# Altium PCB EnviromentalBoard_panel.PcbDoc
Units mm, origin at the board's own origin, x right, y up, seen from the top; angles counter-clockwise.
Board outline 138.18 x 213.49 mm, 2 copper layers (Top Layer, Bottom Layer); 9 components, 0 nets, 9 pads, 0 vias.
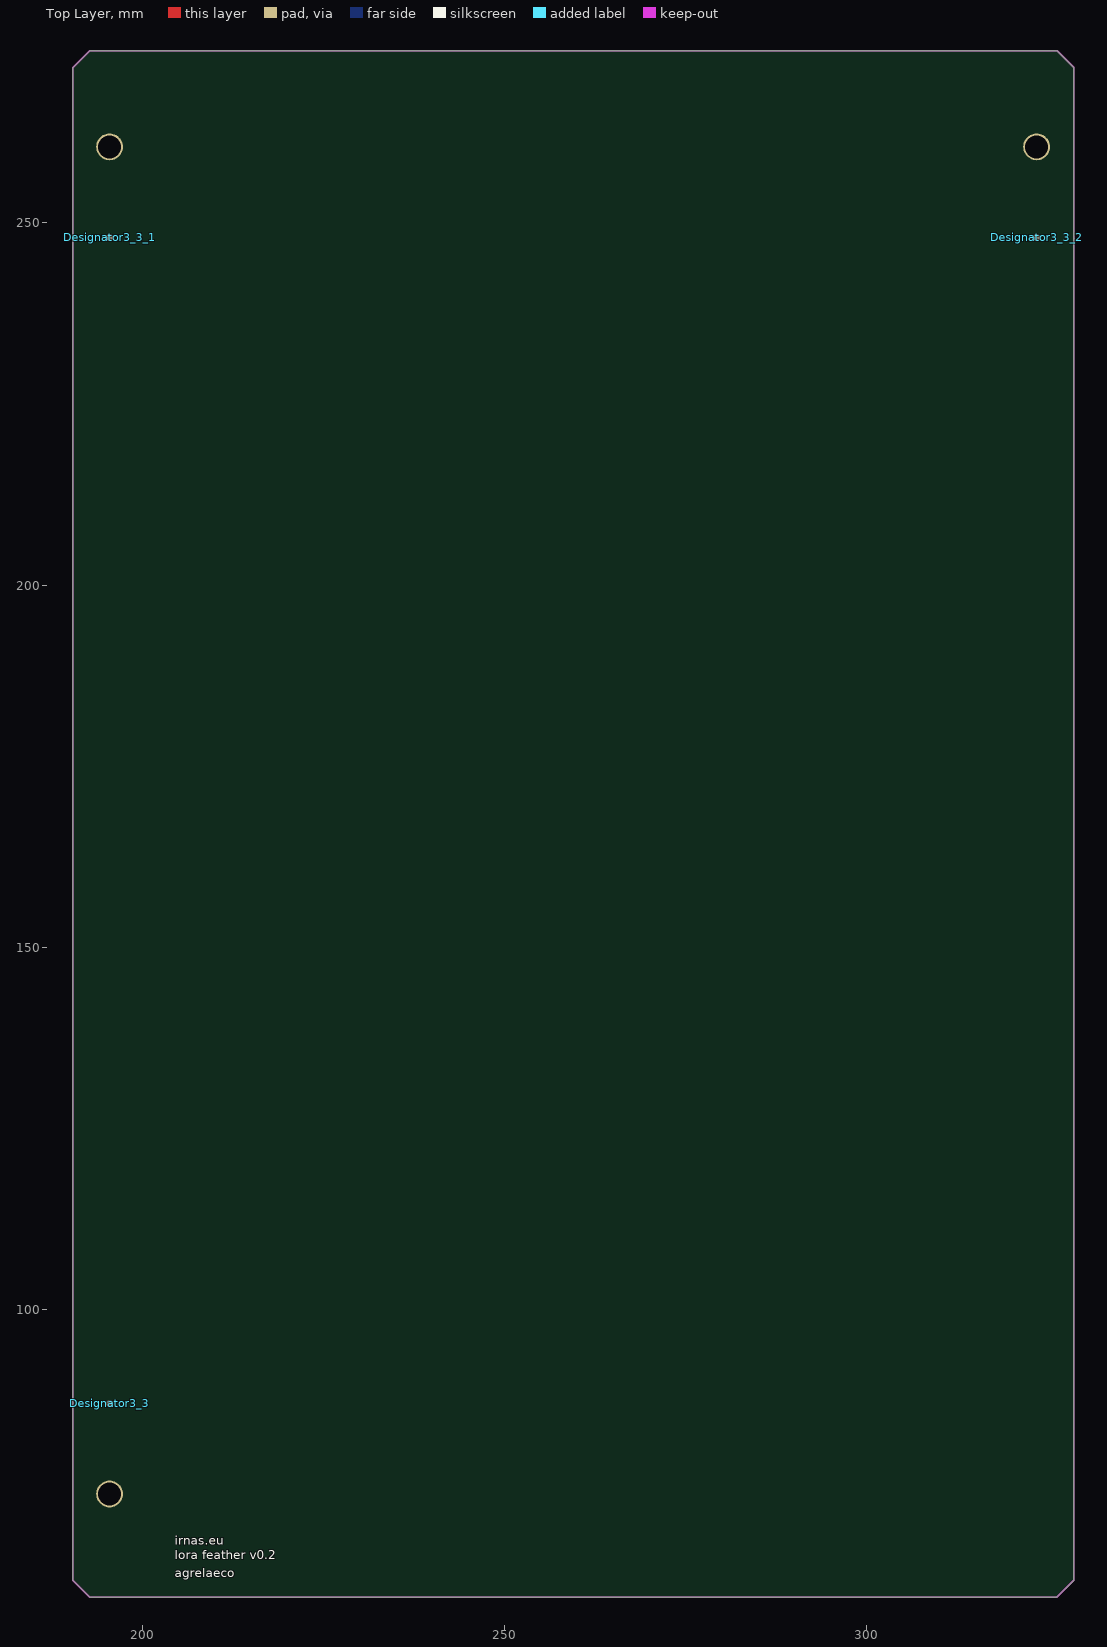
[diagram p0: Top Layer view]
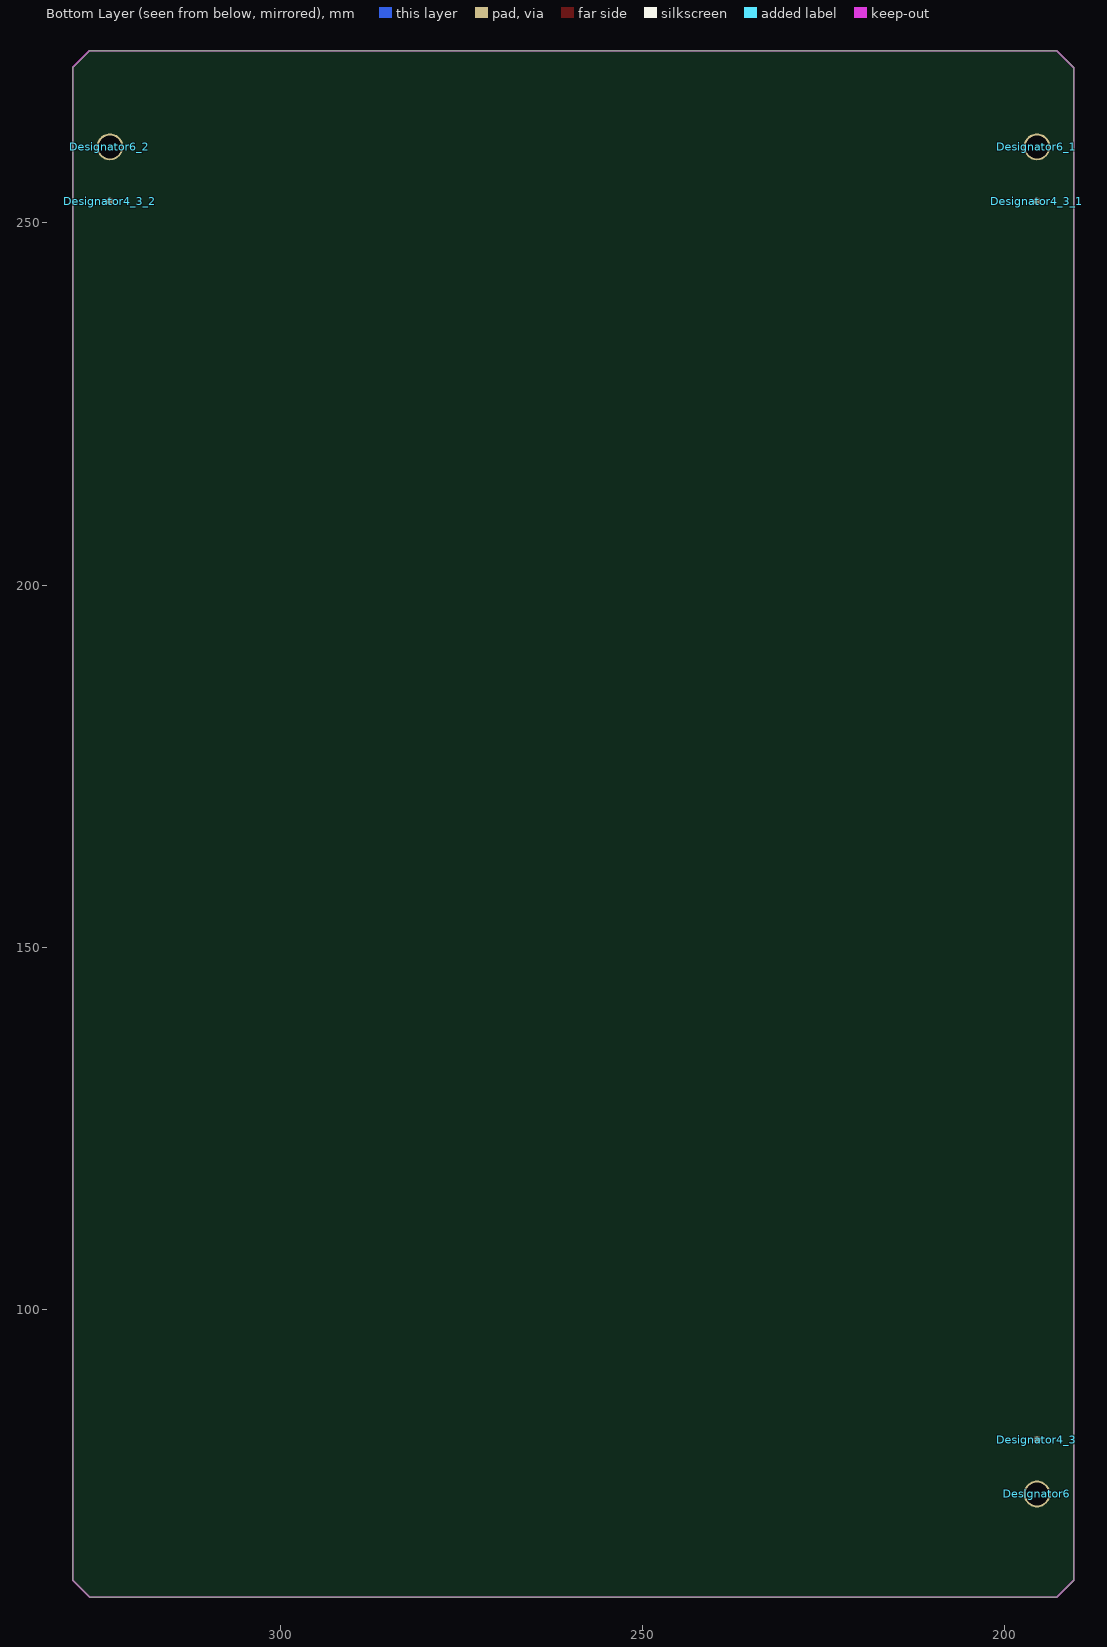
[diagram p1: Bottom Layer view, seen from below]

## Layer stack, top to bottom
Top Solder: solder mask 0.0102, Solder Resist, Dk 3.5
Top Layer: signal copper 0.0356
Dielectric 1: dielectric 0.32, FR-4, Dk 4.8
Bottom Layer: signal copper 0.0356
Bottom Solder: solder mask 0.0102, Solder Resist, Dk 3.5

## Board outline
190.433,62.569 192.744,60.258 326.305,60.258 328.616,62.569 328.616,271.474 326.338,273.752 192.744,273.752 190.433,271.441

## Design rules (kind name [scope] priority, off if disabled: settings)
Clearance [All] p1: gap=0.254 ignorepadtopadclearanceinfootprint=FALSE except(0: Arc-Hole Track-Hole SMDPad-Hole THPad-Hole Via-Hole Fill-Hole Poly-Hole Region-Hole Text-Hole)
PolygonConnect [All] p1: connectstyle=Relief reliefconductorwidth=0.254 reliefentries=4 polygonreliefangle="90 Angle" airgapwidth=0.254
RoutingVias [All] p1: holewidth=0.711 width=1.27 viastyle="Through Hole" minholewidth=0.711 minwidth=1.27 maxholewidth=0.711 maxwidth=1.27
SolderMaskExpansion [All] p1: expansion=0.102
Width [All] p1: maxlimit=0.254 minlimit=0.254 preferedwidth=0.254
30 further rules are at their usual default settings.

## Components (designator, comment, footprint, x,y, rotation, side; value= is the part's Value field where it differs from the comment)
Designator3_3 "Comment" FIDUCIAL 195.5,87 r270 top
Designator3_3_1 "Comment" FIDUCIAL 195.5,248 r90 top
Designator3_3_2 "Comment" FIDUCIAL 323.5,248 r90 top
Designator4_3 "Comment" FIDUCIAL 195.5,82 r90 bottom
Designator4_3_1 "Comment" FIDUCIAL 195.5,253 r270 bottom
Designator4_3_2 "Comment" FIDUCIAL 323.5,253 r270 bottom
Designator6 "Comment" HOLE 195.5,74.5 r90 bottom
Designator6_1 "Comment" HOLE 195.5,260.5 r270 bottom
Designator6_2 "Comment" HOLE 323.5,260.5 r270 bottom

## Footprints (in the part's own frame and the unit in brackets; to place one, negate y for a bottom-side part, rotate by r counter-clockwise, add the part's x,y. Pads: shape width x height; smd on the part's side, far side on the other; paste and mask are expansions set on the pad)
FIDUCIAL [mm]
  round 1 smd paste+0 mask+0.5: ""(0,0)
HOLE [mm]
  round 3.7 hole 3.2 unplated paste+0 mask+0: ""(0,0)

## Nets (pads, with @x,y where several pads share a name; then routed paths per layer and width w, separated by ;. In a path a pad name is that pad's centre, name@x,y a point inside that pad or via, vN(x,y) a via of type N, cw(c..) or ccw(c..) an arc to the next point about the centre after c; other vN are vias at no path point)
pads on no net: Designator3_3. Designator3_3_1. Designator3_3_2. Designator4_3. Designator4_3_1. Designator4_3_2. Designator6. Designator6_1. Designator6_2.

## Keep-outs
Keep-Out Layer:
  the board outline again, w0.2

## Silkscreen, mask and mechanical layers (free items; w line width, h text height)
Top Overlay:
  text "irnas.eu" at 204.5,67.5 h1.2
  text "lora feather v0.2" at 204.5,65.5 h1.2
  text "agrelaeco" at 204.5,63 h1.2
Mechanical 1:
  lines w0.2: 190.433,271.399 cw(c190.533,271.399) 190.462,271.47 ; 190.433,62.569 192.744,60.258 326.305,60.258 328.616,62.569 328.616,271.474 326.338,273.752 192.744,273.752 190.433,271.441 190.433,62.569
V-groove:
  lines w0.2: 179.05,70 342.45,70 ; 179.05,166.85 342.45,166.85 ; 179.05,263.675 342.45,263.675 ; 200.4,44.35 200.4,284.675 ; 224.025,44.35 224.025,284.675 ; 247.725,44.375 247.725,284.7 ; 271.45,44.35 271.45,284.675 ; 295.15,44.35 295.15,284.675 ; 318.725,44.35 318.725,284.675
  text "V-groove" at 202.1,287.15 h3 r90
  text "V-groove" at 226.05,286.75 h3 r90
  text "V-groove" at 273.925,286.475 h3 r90
  text "V-groove" at 249.975,286.2 h3 r90
  text "V-groove" at 320.725,286.075 h3 r90
  text "V-groove" at 297.725,285.95 h3 r90
  text "V-groove" at 154.375,261.6 h3
  text "V-groove" at 343.825,261.05 h3
  text "V-groove" at 152.875,164.75 h3
  text "V-groove" at 343.3,164.075 h3
  text "V-groove" at 343.575,67.5 h3
  text "V-groove" at 154.1,67.375 h3
  text "V-groove" at 201.975,19.75 h3 r90
  text "V-groove" at 226.175,19.75 h3 r90
  text "V-groove" at 249.85,19.75 h3 r90
  text "V-groove" at 273.375,19.075 h3 r90
  text "V-groove" at 297.175,18.8 h3 r90
  text "V-groove" at 320.575,18.55 h3 r90

## Dimensions
192.744,273.752 to 192.744,60.258 on Mechanical 1
328.616,271.474 to 190.433,271.441 on Mechanical 1

## Panel: embedded boards
"Lora_feather.PcbDoc" at 318.516,70.231, 5 rows x 2 columns, spacing 23.711 x 96.971, rotation 90